# Altium PCB HEADSET-PCB.PcbDoc
Units mil, origin at the board's own origin, x right, y up, seen from the top; angles counter-clockwise.
Board outline 1235 x 1600 mil, 2 copper layers (Top Layer, Bottom Layer); 61 components, 57 nets, 232 pads, 104 vias.
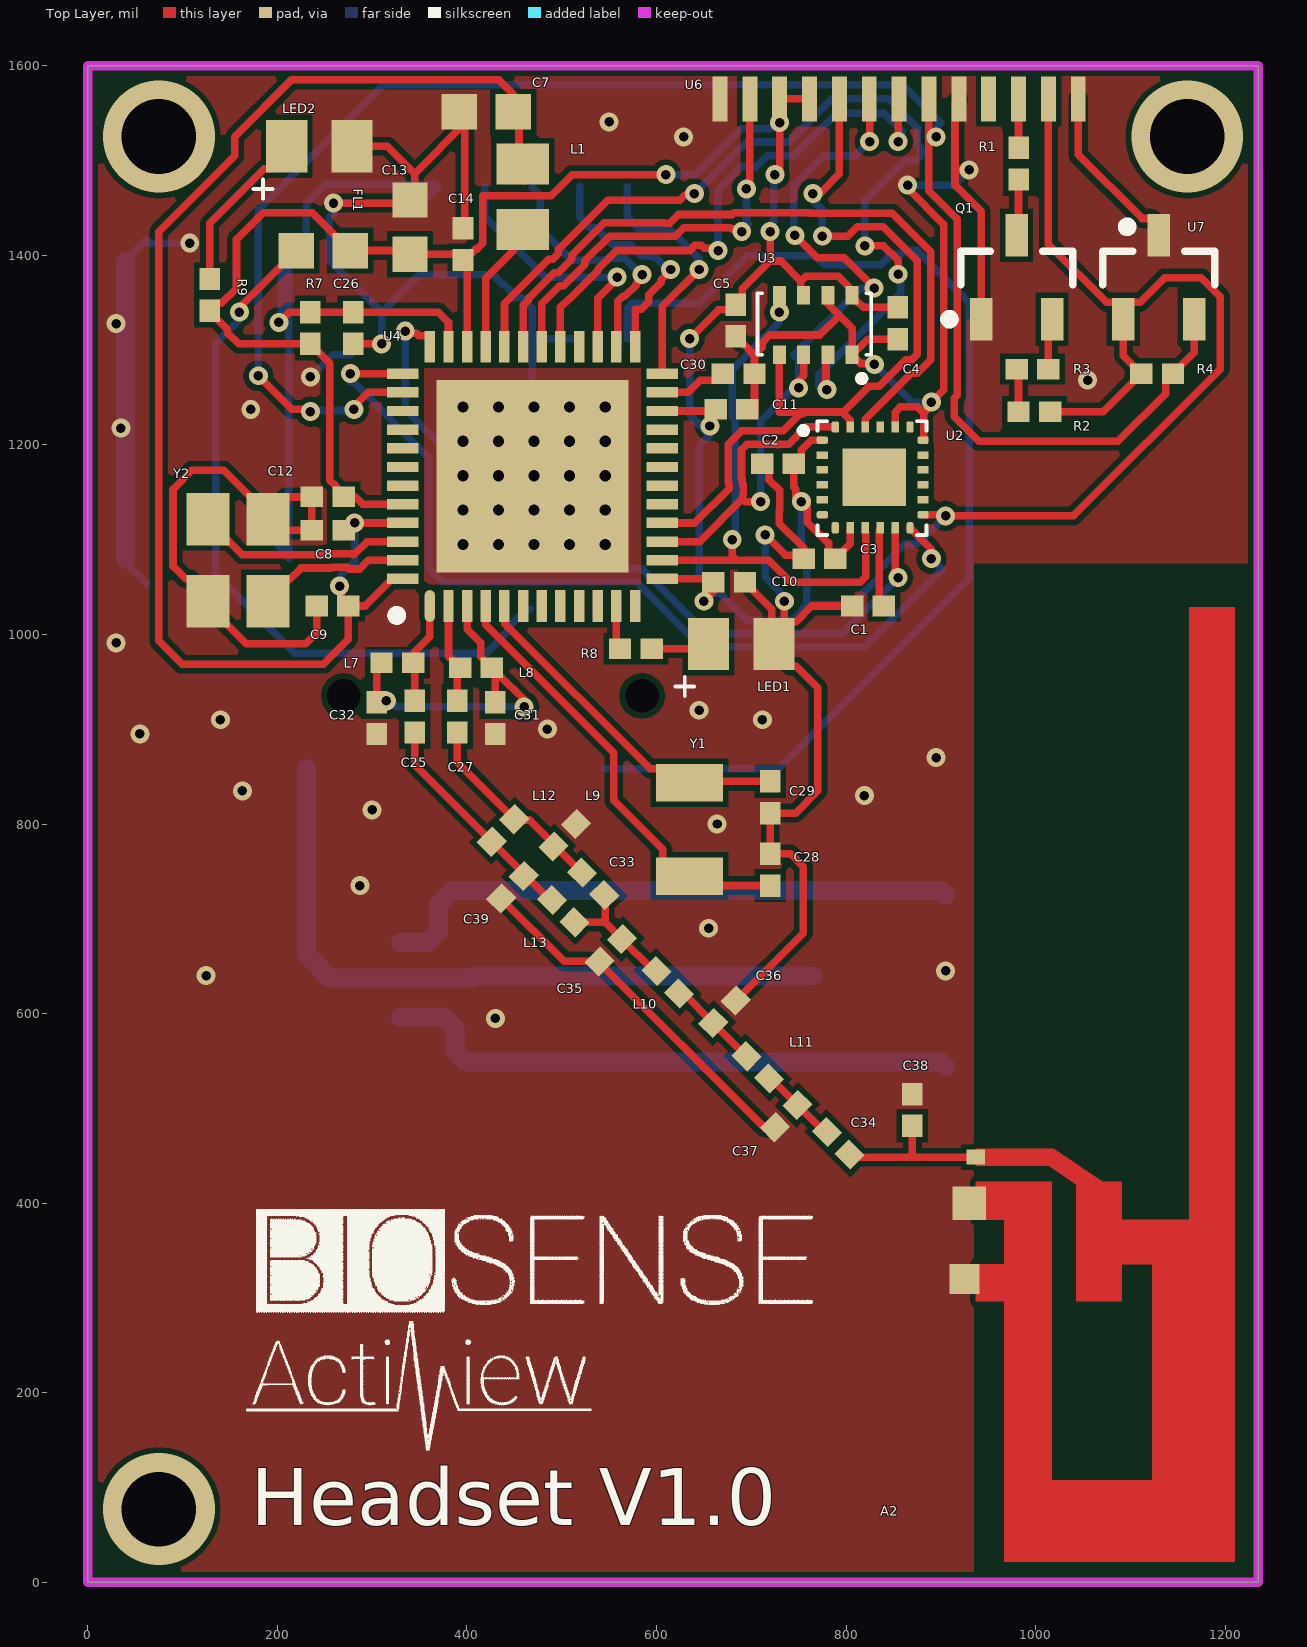
[diagram p0: Top Layer view]
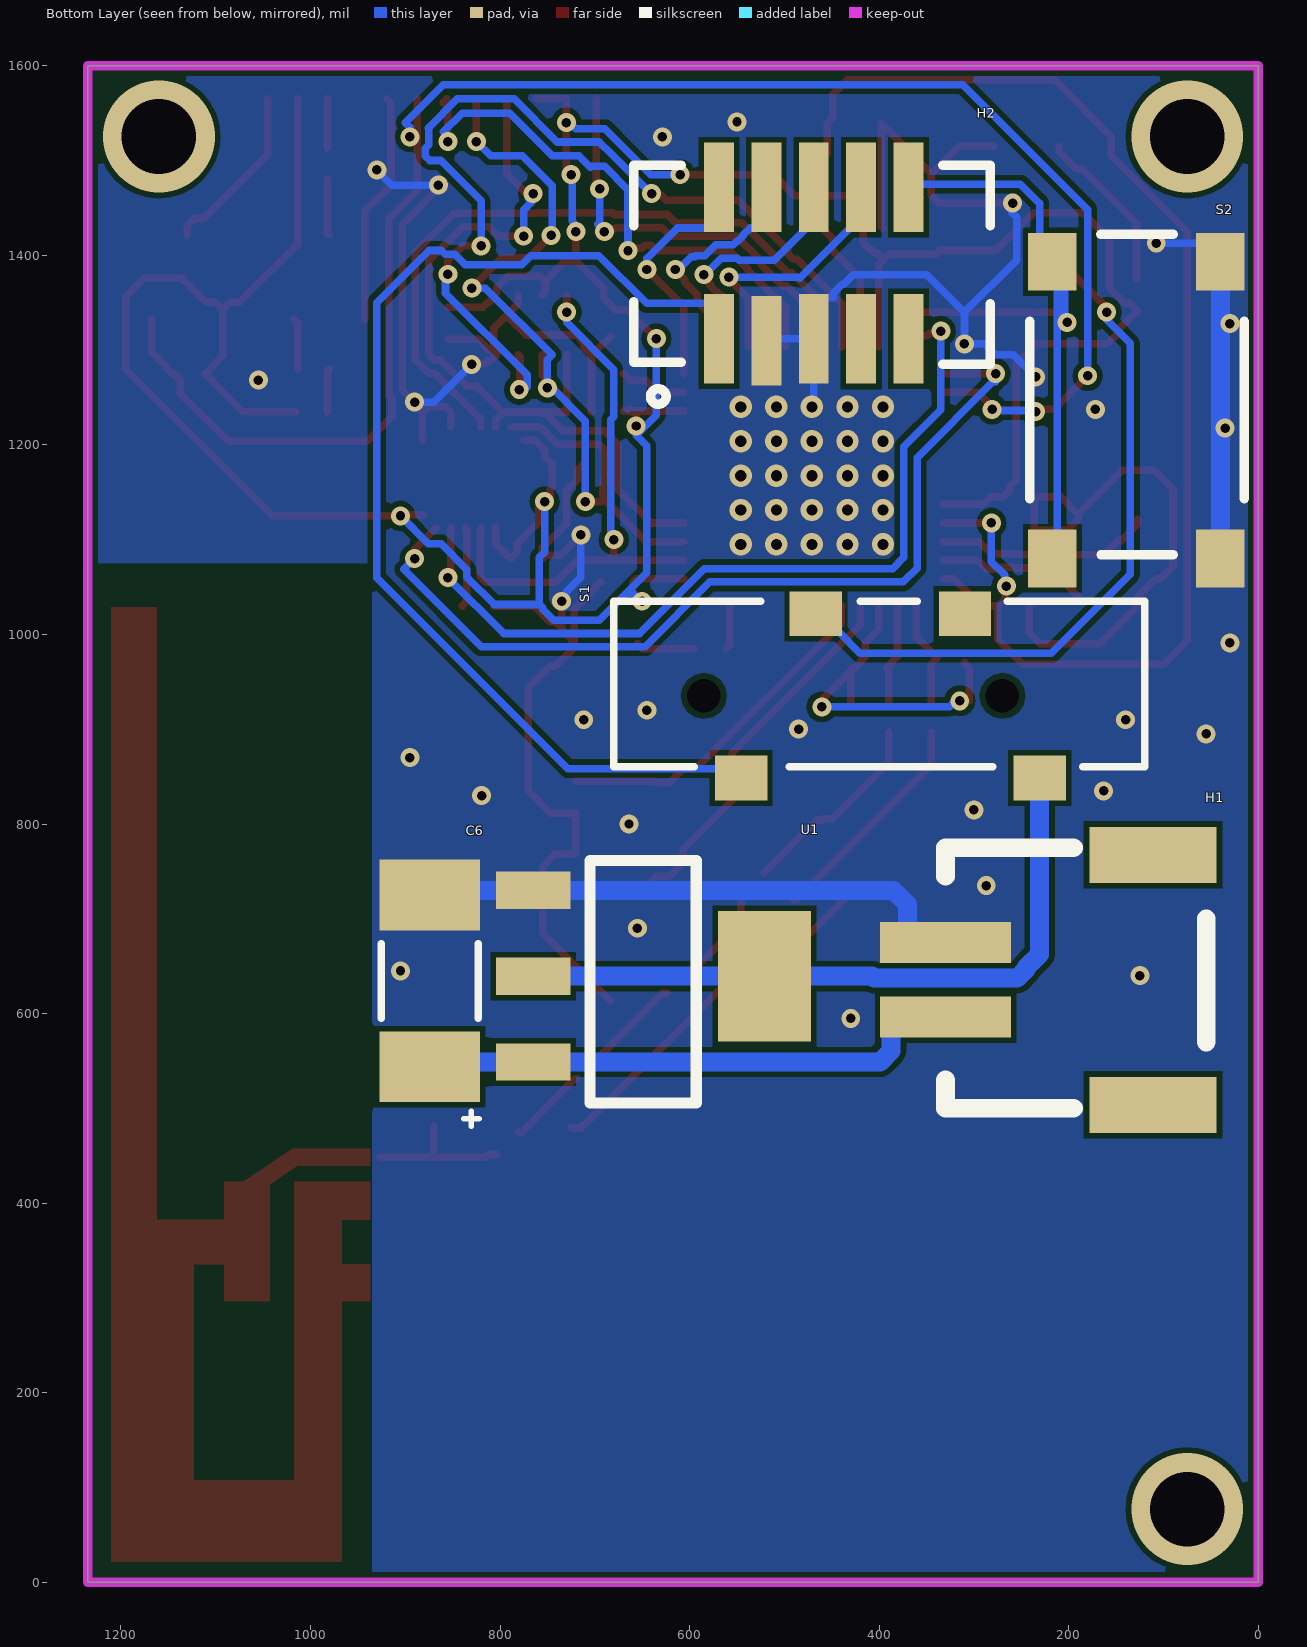
[diagram p1: Bottom Layer view, seen from below]

## Layer stack, top to bottom
Top Solder: solder mask 0.4, Solder Resist, Dk 3.5
Top Layer: signal copper 1.4
Dielectric 1: dielectric 12.6, FR-4, Dk 4.8
Bottom Layer: signal copper 1.4
Bottom Solder: solder mask 0.4, Solder Resist, Dk 3.5

## Board outline
0,0 1235,0 1235,1600 0,1600

## Design rules (kind name [scope] priority, off if disabled: settings)
Clearance [All] p1: gap=6 ignorepadtopadclearanceinfootprint=FALSE
ComponentClearance [All] p1: gap=0 collisioncheckmode=3 verticalgap=0 showdistances=FALSE
HoleSize [All] p1: absolutevalues=TRUE maxlimit=1000 minlimit=10 maxpercent=80.000 minpercent=20.000
MinimumSolderMaskSliver [All] p1: minsoldermaskwidth=0.05
PolygonConnect [All] p1: connectstyle=Direct reliefconductorwidth=10 reliefentries=4 polygonreliefangle="90 Angle" airgapwidth=10
RoutingVias [All] p1: holewidth=11.81 width=23.62 viastyle="Through Hole" minholewidth=10 minwidth=20 maxholewidth=196.85 maxwidth=196.85
SilkToSolderMaskClearance [IsPad] p1: minsilkscreentomaskgap=1 clearancetoexposedcopper=TRUE
SolderMaskExpansion [All] p1: expansion=4
Width [All] p1: maxlimit=20 minlimit=8 preferedwidth=8
26 further rules are at their usual default settings.

## Classes and differential pairs
component class IMU_MPU9250: C1 C2 C3 U2
component class LCD_Display: Q1 R1 R2 R3 R4 U6 U7
component class Microcontroller_CC1350: A2 C6 C7 C8 C9 C10 C11 C12 C13 C14 C25 C26 C27 C28 C29 C30 C31 C32 C33 C34 C35 C36 C37 C38 C39 FL1 H1 H2 L1 L7 L8 L9 L10 L11 L12 L13 LED1 LED2 R7 R8 R9 S1 S2 U1 U4 Y1 Y2
component class Pressure_BMP280: C4 C5 U3

## Components (designator, comment, footprint, x,y, rotation, side; value= is the part's Value field where it differs from the comment)
A2 "ANTENNA_DN007" Inverted_F_Antenna 1145,415 r90 top
C1 "0.1uF" 0402[IMP] 840,1030 r180 top
C2 "10nF" 0402[IMP] 745,1180 r180 top
C3 "0.1uF" 0402[IMP] 788.78,1080 r180 top
C4 "100nF" 0402[IMP] 854.47,1345 r270 top
C5 "100nF" 0402[IMP] 683.66,1347.99 r270 top
C6 "150uF" "2312 [IMP] Polar" 874.17,725 r270 bottom
C7 "22uF" 0603[IMP] 449.09,1551.2 r180 top
C8 "100nF" 0402[IMP] 270,1110 r180 top
C9 "100nF" 0402[IMP] 275,1030 r180 top
C10 "100nF" 0402[IMP] 660,1055 r0 top
C11 "100nF" 0402[IMP] 662.53,1237.43 r0 top
C12 "100nF" 0402[IMP] 270,1145 r180 top
C13 "22uF" 0603[IMP] 340,1401.22 r90 top
C14 "100nF" 0402[IMP] 395.95,1395 r90 top
C25 "12pF" 0402[IMP] 345,930 r270 top
C26 "100nF" 0402[IMP] 280,1340 r270 top
C27 "12pF" 0402[IMP] 390,930 r270 top
C28 "12pF" 0402[IMP] 720,735 r90 top
C29 "12pF" 0402[IMP] 720,845 r270 top
C30 "1uF" 0402[IMP] 670,1275 r0 top
C31 "12pF" 0402[IMP] 430,928.46 r270 top
C32 "12pF" 0402[IMP] 305,928.46 r270 top
C33 "1pF" 0402[IMP] 521.34,748.66 r315 top
C34 "12pF" 0402[IMP] 780,475 r315 top
C35 "DNI" 0402[IMP] 540,655 r45 top
C36 "3.6pF" 0402[IMP] 660,590 r45 top
C37 "1pF" 0402[IMP] 725,480 r45 top
C38 "1pF" 0402[IMP] 870,515 r270 top
C39 "1pF" 0402[IMP] 460,745 r225 top
FL1 "BLM18HE152SN1" 0603[IMP] 220,1405 r0 top
H1 "Battery Header" S2B-PH-SM4-TB 330,675 r270 bottom
H2 "JTAG" HDR-2*5-0.05_Without_Through_Hole 475,1385 r0 bottom
L1 "6.8uH" 0805[IMP] 458.94,1427.3 r90 top
L7 "10nH" 0402[IMP] 310,970 r0 top
L8 "10nH" 0402[IMP] 426.34,965 r180 top
L9 "2.2nH" 0402[IMP] 491.34,776.34 r45 top
L10 "1.5nH" 0402[IMP] 600,645 r315 top
L11 "2.2nH" 0402[IMP] 695,555 r315 top
L12 "DNI" 0402[IMP] 426.34,781.34 r45 top
L13 "2.2nH" 0402[IMP] 490,720 r315 top
LED1 "LEDG" "0805[IMP] - POLAR" 655,990 r0 top value=?
LED2 "LEDR" "0805[IMP] - POLAR" 210,1515 r0 top value=?
Q1 "MMBT2222" SOT-23_N 980,1376.83 r90 top
R1 "22" 0402[IMP] 982.01,1480 r90 top
R2 "10K" 0402[IMP] 982.01,1235 r0 top
R3 "1K" 0402[IMP] 980,1280 r0 top
R4 "10K" 0402[IMP] 1145,1275.08 r180 top
R7 "100k" 0402[IMP] 235,1340 r270 top
R8 "330" 0402[IMP] 595,985 r180 top
R9 "330" 0402[IMP] 128.54,1375 r270 top
S1 "SW-SP3T" CL-SB-13B 270,935.16 r0 bottom
S2 "SW_TACT" PTS645SH50SMTR92_LFS 40,1393.24 r270 bottom
U1 "1117-3.3" SOT-223 765,730 r270 bottom
U2 "MPU-9250" QFN-24-3mmx3mm 775,1205 r0 top
U3 "BMP280" LGA-8 806.54,1295 r270 top
U4 "IC_RF_CC13XX_7X7_QFN48_V2" "RGZ(S-PVQFN-N48) - duplicate" 360.95,1030 r90 top
U6 "LCD_TFT_Display" LCD_Ribbon 1045,1565 r90 top
U7 "APX803" SOT23_N 1130,1376.83 r90 top
Y1 "32.768kHz" FC-135 635,745 r90 top
Y2 "24MHz" TSX-3225 190,1035 r90 top

## Footprints (in the part's own frame and the unit in brackets; to place one, negate y for a bottom-side part, rotate by r counter-clockwise, add the part's x,y. Pads: shape width x height; smd on the part's side, far side on the other; paste and mask are expansions set on the pad)
0402[IMP] [mm]
  rect 0.6x0.55 smd: 1(0,0) 2(0.85,0)
0603[IMP] [mm]
  rect 0.95x0.95 smd: 1(0,0) 2(1.45,0)
0805[IMP] [mm]
  rect 1.1x1.4 smd: 1(0,0) 2(1.75,0)
"0805[IMP] - POLAR" [mm]
  rect 1.1x1.4 smd: 1(0,0) 2(1.75,0)
  silkscreen extent -0.89,-1.4 -0.38,-0.89
"2312 [IMP] Polar" [mm]
  rect 1.9x2.7 smd: 1(0,0) 2(4.6,0)
  silkscreen extent 1.3,-1.3 6.2,1.32
CL-SB-13B [mm] "Three pos switch"
  round 0.1 hole 0.9: 0(0,0) 0(8,0)
  rect 1.4x1.2 smd: 1(-1,2.2) 2(1,-2.2) 3(5,-2.2) 4(7,2.2)
  silkscreen extent -3.81,-2.54 10.41,1.91
FC-135 [mm]
  rect 1x1.8 smd: 1(0,0) 2(2.5,0)
HDR-2*5-0.05_Without_Through_Hole [mm]
  rect 0.8x2.4 smd: 1(2.388,1.854) 2(2.388,-2.21) 3(1.118,1.905) 4(1.118,-2.21) 5(-0.152,1.854) 6(-0.152,-2.21) 7(-1.422,1.854) 8(-1.422,-2.21) 9(-2.692,1.854) 10(-2.692,-2.21)
  silkscreen extent -4.88,-2.79 4.67,3.61
Inverted_F_Antenna [mil]
  rect 15.75x19.68 smd: 1(33.5,208)
  rect 35.43x35.43 smd: 2(-15,215)
  rect 31.5x31.5 smd: 3(-95,220)
  Top Layer region: -393.5,178 -393.5,-65 613.5,-65 613.5,-17 -32.5,-17 -32.5,54 7.5,54 7.5,74 42.5,126 42.5,208 24.5,208 24.5,131 4.5,102 -118.5,102 -118.5,54 -79.5,54 -79.5,22 -307.5,22 -307.5,128 7.5,128 7.5,208 -32.5,208 -32.5,178 -79.5,178 -79.5,208 -118.5,208 -118.5,178 -393.5,178
LCD_Ribbon [mm]
  rect 1.2x0.4 smd: 1(0,0) 2(0,0.8) 3(0,1.6) 4(0,2.4) 5(0,3.2) 6(0,4) 7(0,4.8) 8(0,5.6) 9(0,6.4) 10(0,7.2) 11(0,8) 12(0,8.8) 13(0,9.6)
LGA-8 [mm]
  rect 0.5x0.35 smd mask+0.05: 1(0,0) 2(0,-0.65) 3(0,-1.3) 4(0,-1.95) 5(-1.6,-1.95) 6(-1.6,-1.3) 7(-1.6,-0.65) 8(-1.6,0)
  silkscreen extent -1.65,-2.54 0.68,0.51
PTS645SH50SMTR92_LFS [mm] "Tactile switch"
  rect 1.55x1.3 smd: 1(0,0) 1(7.95,0) 2(0,-4.5) 2(7.95,-4.5)
  silkscreen extent -0.74,-5.11 7.85,0.63
QFN-24-3mmx3mm [mm]
  rrect50% 0.3x0.2 smd mask+0.05: 1(0,0) 6(0,-2) 13(2.7,-2) 18(2.7,0)
  rect 0.3x0.2 smd mask+0.05: 2(0,-0.4) 3(0,-0.8) 4(0,-1.2) 5(0,-1.6) 14(2.7,-1.6) 15(2.7,-1.2) 16(2.7,-0.8) 17(2.7,-0.4)
  rrect50% 0.2x0.3 smd mask+0.05: 7(0.35,-2.35) 12(2.35,-2.35) 19(2.35,0.35) 24(0.35,0.35)
  rect 0.2x0.3 smd mask+0.05: 8(0.75,-2.35) 9(1.15,-2.35) 10(1.55,-2.35) 11(1.95,-2.35) 20(1.95,0.35) 21(1.55,0.35) 22(1.15,0.35) 23(0.75,0.35)
  rect 1.7x1.54 smd mask+0.05: 25(1.397,-1)
  silkscreen extent -0.56,-2.54 2.79,0.51
"RGZ(S-PVQFN-N48) - duplicate" [mm]
  oval 0.85x0.28 smd mask+0.07: 1(0,0)
  rect 0.85x0.28 smd mask+0.07: 2(0,-0.5) 3(0,-1) 4(0,-1.5) 5(0,-2) 6(0,-2.5) 7(0,-3) 8(0,-3.5) 9(0,-4) 10(0,-4.5) 11(0,-5) 12(0,-5.5) 25(6.95,-5.5) 26(6.95,-5) 27(6.95,-4.5) 28(6.95,-4) 29(6.95,-3.5) 30(6.95,-3) 31(6.95,-2.5) 32(6.95,-2) 33(6.95,-1.5) 34(6.95,-1) 35(6.95,-0.5) 36(6.95,0)
  rect 0.28x0.85 smd mask+0.07: 13(0.725,-6.225) 14(1.225,-6.225) 15(1.725,-6.225) 16(2.225,-6.225) 17(2.725,-6.225) 18(3.225,-6.225) 19(3.725,-6.225) 20(4.225,-6.225) 21(4.725,-6.225) 22(5.225,-6.225) 23(5.725,-6.225) 24(6.225,-6.225) 37(6.225,0.725) 38(5.725,0.725) 39(5.225,0.725) 40(4.725,0.725) 41(4.225,0.725) 42(3.725,0.725) 43(3.225,0.725) 44(2.725,0.725) 45(2.225,0.725) 46(1.725,0.725) 47(1.225,0.725) 48(0.725,0.725)
  rect 5.15x5.15 smd mask+0.07: 49(3.475,-2.75)
  silkscreen extent -0.38,0.76 -0.13,1.02
S2B-PH-SM4-TB [mm] "S2B-PH-SM$-TB"
  rect 1.5x3.4 smd: 0(-2.35,5.56) 0(4.35,5.56)
  rect 1.1x3.5 smd: 1(2,0) 2(0,0)
  silkscreen extent -2.54,0 4.45,6.98
SOT23_N [mm] "SOT23, 3-Leads, Body 2.9x1.3mm, Pitch 0.95mm, Lead Span 2.3mm - Reverse Pinning, IPC Medium Density"
  rect 1.15x0.6 smd: 1(1.125,0) 2(-1.125,-0.95) 3(-1.125,0.95)
  silkscreen extent -0.2,-1.5 1.47,1.5, body extent -0.7,-1.5 0.7,1.5, height 1.1
SOT-23_N [mm] "SOT23, 3-Leads, Body 2.9x1.3mm, Pitch 0.95mm, Lead Span 2.5mm, IPC Medium Density"
  rect 1.15x0.6 smd: 1(-1.125,0.95) 2(-1.125,-0.95) 3(1.125,0)
  silkscreen extent -1.25,-1.5 0.7,1.92, body extent -0.7,-1.5 0.7,1.5, height 1.1
SOT-223 [mm]
  rect 1x2 smd: 1(0,0) 2(2.3,0) 3(4.6,0)
  rect 3.5x2.5 smd: 2(2.3,6.2)
  silkscreen extent -0.8,1.52 5.7,4.37
TSX-3225 [mm]
  rect 1.4x1.15 smd: 1(0,0) 2(2.2,0) 3(2.2,1.6) 4(0,1.6)

## Part data
C1 C2 C3 C4 C5 C35: library part CAPACITOR, Current=CIMAX, MAX_TEMP=CTMAX, PSpiceTemplate="C^@REFDES %1 %2 ?TOLERANCE|C^@REFDES| @VALUE ?IC/IC=@IC/ TC=@TC1,@TC2 ?TOLERANCE|\n.model C^@REFDES CAP C=1 DEV=@TOLERANCE%|", VOLTAGE=CMAX, CLASS=DISCRETE, DIST=FLAT, KNEE=CBMAX, SLOPE=CSMAX, TC1=0, TC2=0
C6: library part Cap_E, "Capacitor", Supplier Part Number 1=478-3481-1-ND, Supplier 1=Digi-Key
C7 C13: library part CAPACITOR, Current=CIMAX, MAX_TEMP=CTMAX, PSpiceTemplate="C^@REFDES %1 %2 ?TOLERANCE|C^@REFDES| @VALUE ?IC/IC=@IC/ TC=@TC1,@TC2 ?TOLERANCE|\n.model C^@REFDES CAP C=1 DEV=@TOLERANCE%|", Supplier Part Number 1=490-7611-1-ND, VOLTAGE=CMAX, CLASS=DISCRETE, DIST=FLAT, KNEE=CBMAX, SLOPE=CSMAX, Supplier 1=Digi-Key, TC1=0, TC2=0
C8 C9 C10 C11 C12 C14 C26: library part CAPACITOR, Current=CIMAX, MAX_TEMP=CTMAX, PSpiceTemplate="C^@REFDES %1 %2 ?TOLERANCE|C^@REFDES| @VALUE ?IC/IC=@IC/ TC=@TC1,@TC2 ?TOLERANCE|\n.model C^@REFDES CAP C=1 DEV=@TOLERANCE%|", Supplier Part Number 1=490-6327-1-ND, VOLTAGE=CMAX, CLASS=DISCRETE, DIST=FLAT, KNEE=CBMAX, SLOPE=CSMAX, Supplier 1=Digi-Key, TC1=0, TC2=0
C25 C27 C28 C29 C31 C32: library part CAPACITOR, Current=CIMAX, MAX_TEMP=CTMAX, PSpiceTemplate="C^@REFDES %1 %2 ?TOLERANCE|C^@REFDES| @VALUE ?IC/IC=@IC/ TC=@TC1,@TC2 ?TOLERANCE|\n.model C^@REFDES CAP C=1 DEV=@TOLERANCE%|", Supplier Part Number 1=399-1013-1-ND, VOLTAGE=CMAX, CLASS=DISCRETE, DIST=FLAT, KNEE=CBMAX, SLOPE=CSMAX, Supplier 1=Digi-Key, TC1=0, TC2=0
C30: library part CAPACITOR, Current=CIMAX, MAX_TEMP=CTMAX, PSpiceTemplate="C^@REFDES %1 %2 ?TOLERANCE|C^@REFDES| @VALUE ?IC/IC=@IC/ TC=@TC1,@TC2 ?TOLERANCE|\n.model C^@REFDES CAP C=1 DEV=@TOLERANCE%|", Supplier Part Number 1=1276-1448-1-ND, VOLTAGE=CMAX, CLASS=DISCRETE, DIST=FLAT, KNEE=CBMAX, SLOPE=CSMAX, Supplier 1=Digi-Key, TC1=0, TC2=0
C33 C37 C38 C39: library part CAPACITOR, Current=CIMAX, MAX_TEMP=CTMAX, PSpiceTemplate="C^@REFDES %1 %2 ?TOLERANCE|C^@REFDES| @VALUE ?IC/IC=@IC/ TC=@TC1,@TC2 ?TOLERANCE|\n.model C^@REFDES CAP C=1 DEV=@TOLERANCE%|", Supplier Part Number 1=490-3199-1-ND, VOLTAGE=CMAX, CLASS=DISCRETE, DIST=FLAT, KNEE=CBMAX, SLOPE=CSMAX, Supplier 1=Digi-Key, TC1=0, TC2=0
C34: library part CAPACITOR, Current=CIMAX, MAX_TEMP=CTMAX, PSpiceTemplate="C^@REFDES %1 %2 ?TOLERANCE|C^@REFDES| @VALUE ?IC/IC=@IC/ TC=@TC1,@TC2 ?TOLERANCE|\n.model C^@REFDES CAP C=1 DEV=@TOLERANCE%|", Supplier Part Number 1=490-5924-1-ND, VOLTAGE=CMAX, CLASS=DISCRETE, DIST=FLAT, KNEE=CBMAX, SLOPE=CSMAX, Supplier 1=Digi-Key, TC1=0, TC2=0
C36: library part CAPACITOR, Current=CIMAX, MAX_TEMP=CTMAX, PSpiceTemplate="C^@REFDES %1 %2 ?TOLERANCE|C^@REFDES| @VALUE ?IC/IC=@IC/ TC=@TC1,@TC2 ?TOLERANCE|\n.model C^@REFDES CAP C=1 DEV=@TOLERANCE%|", Supplier Part Number 1=490-5939-1-ND, VOLTAGE=CMAX, CLASS=DISCRETE, DIST=FLAT, KNEE=CBMAX, SLOPE=CSMAX, Supplier 1=Digi-Key, TC1=0, TC2=0
FL1: library part INDUCTOR, Current=LMAX, DIELECTRIC=DSMAX, PSpiceTemplate="L^@REFDES %1 %2 ?TOLERANCE|L^@REFDES| @VALUE ?IC/IC=@IC/ ?TOLERANCE|\n.model l^@REFDES IND L=1 DEV=@TOLERANCE%|", Supplier Part Number 1=490-5216-1-ND, DIST=FLAT, Supplier 1=Digi-Key
H1: library part "Header 2", Supplier Part Number 1=455-1749-1-ND, Supplier 1=Digi-Key
H2: library part JTAG-ARM, "USB JTAG Programmer", Supplier Part Number 1=SAM13160CT-ND, Supplier 1=Digi-Key
L1: library part INDUCTOR, Current=LMAX, DIELECTRIC=DSMAX, PSpiceTemplate="L^@REFDES %1 %2 ?TOLERANCE|L^@REFDES| @VALUE ?IC/IC=@IC/ ?TOLERANCE|\n.model l^@REFDES IND L=1 DEV=@TOLERANCE%|", Supplier Part Number 1=445-6761-1-ND, DIST=FLAT, Supplier 1=Digi-Key
L7 L8: library part INDUCTOR, Current=LMAX, DIELECTRIC=DSMAX, PSpiceTemplate="L^@REFDES %1 %2 ?TOLERANCE|L^@REFDES| @VALUE ?IC/IC=@IC/ ?TOLERANCE|\n.model l^@REFDES IND L=1 DEV=@TOLERANCE%|", Supplier Part Number 1=712-1407-1-ND, DIST=FLAT, Supplier 1=Digi-Key
L9 L11 L13: library part INDUCTOR, Current=LMAX, DIELECTRIC=DSMAX, PSpiceTemplate="L^@REFDES %1 %2 ?TOLERANCE|L^@REFDES| @VALUE ?IC/IC=@IC/ ?TOLERANCE|\n.model l^@REFDES IND L=1 DEV=@TOLERANCE%|", Supplier Part Number 1=490-6794-1-ND, DIST=FLAT, Supplier 1=Digi-Key
L10: library part INDUCTOR, Current=LMAX, DIELECTRIC=DSMAX, PSpiceTemplate="L^@REFDES %1 %2 ?TOLERANCE|L^@REFDES| @VALUE ?IC/IC=@IC/ ?TOLERANCE|\n.model l^@REFDES IND L=1 DEV=@TOLERANCE%|", Supplier Part Number 1=490-6783-1-ND, DIST=FLAT, Supplier 1=Digi-Key
L12: library part INDUCTOR, Current=LMAX, DIELECTRIC=DSMAX, PSpiceTemplate="L^@REFDES %1 %2 ?TOLERANCE|L^@REFDES| @VALUE ?IC/IC=@IC/ ?TOLERANCE|\n.model l^@REFDES IND L=1 DEV=@TOLERANCE%|", DIST=FLAT
LED1: library part LED_G, "LED", Supplier 1=Digi-Key, Supplier 2=Digi-Key, Supplier Part Number 2=475-1410-1-ND
LED2: library part LED_R, "LED", Supplier Part Number 1=475-1278-1-ND, Supplier 1=Digi-Key
Q1: library part 2N3904, "NPN General Purpose Amplifier", ComponentLink1Description="Manufacturer Link", ComponentLink1URL=http://www.fairchildsemi.com/, ComponentLink2Description=Datasheet, ComponentLink2URL=http://www.fairchildsemi.com/ds/2N%2F2N3904.pdf, DatasheetVersion=1997, LatestRevisionDate=15-Jan-2003, LatestRevisionNote="PCB Footprint 'BCY-W3/D4.7' replaced", PackageDescription="TO, Flat Index; 3 In-Line, Axial Leads; Body Dia. 4.5mm; Leads 0.51 x 0.48 mm (max)", PackageReference=TO-92A, PackageVersion=Sep-1998, Published=8-Jun-2000, Publisher="Altium Limited"
R1 R2 R3 R4: library part RESISTOR
R7: library part RESISTOR, Supplier Part Number 1=541-100KYACT-ND, Supplier 1=Digi-Key
R8 R9: library part RESISTOR, Supplier Part Number 1=P330LCT-ND, Supplier 1=Digi-Key
S2: "Tactile switch", Supplier Part Number 1=CKN9085CT-ND, Supplier 1=Digi-Key
U1: library part 1117-3.3V, "3.3V Voltage Regulator", Supplier Part Number 1=LM1117IMPX-3.3/NOPBCT-ND, Supplier 1=Digi-Key
U4: Supplier Part Number 1=296-44716-1-ND, Design_Date=2014-09-04, Designed_By="Artur Bielinski", SPLIT_INST=TRUE, Supplier 1=Digi-Key, SWAP_INFO=(S1+S2)
Y1: library part CRYSTAL, Supplier Part Number 1=SER4089CT-ND, Supplier 1=Digi-Key
Y2: library part XTAL_4PIN_S, Supplier Part Number 1=SER3635CT-ND, Supplier 1=Digi-Key
A2: Design date=2011-09-19, Designed by="Artur Bielinski"

## Via types
v1: diameter 20, hole 10, Top Layer to Bottom Layer, 76 vias
v2: diameter 23.62, hole 11.81, Top Layer to Bottom Layer, 25 vias
v3: diameter 118.11, hole 78.74, Top Layer to Bottom Layer, 3 vias

## Nets (pads, with @x,y where several pads share a name; then routed paths per layer and width w, separated by ;. In a path a pad name is that pad's centre, name@x,y a point inside that pad or via, vN(x,y) a via of type N, cw(c..) or ccw(c..) an arc to the next point about the centre after c; other vN are vias at no path point)
BACKLIGHT: R2.1 R3.1 | length 45.8
  Top Layer w8: R3.1 982.01,1277.99 R2.1
BMP_CS: U3.2 U4.32 | length 993.3
  Top Layer w8: U4.32 439.68,1348.96 486.37,1395.64 490.64,1395.64 496.5,1401.5 496.5,1405.77 548.73,1458 624.72,1458 630,1463.28 ; v1(779.72,1258.25) 778.92,1257.46 778.92,1292.98 U3.2 ; v1(820,1410) 839.55,1410 855,1394.55 v1(855,1380)
  Bottom Layer w8: v1(640,1465) 640.85,1465 646.85,1471 646.9,1471 681.75,1505.84 681.75,1505.9 695.33,1519.48 739.68,1519.48 785.2,1565 845,1565 875.86,1534.14 875,1533.28 875,1516.72 878.85,1512.86 878.85,1504.69 874.17,1500 862.72,1500 820,1457.28 v1(820,1410) ; v1(779.72,1258.25) 774.49,1258.25 771.37,1261.37 771.37,1273.74 857.56,1359.93 857.56,1374.69 855,1377.25 v1(855,1380)
CC1350_SW_PWR: U4.43
CC1350_VDD: FL1.1 S1.3 | length 764.1
  Top Layer w8: v1@163.22,1340 162.3,1340.92 162.3,1347.3 FL1.1
  Bottom Layer w8: v1(160,1340) 160,1331.94 135,1306.94 135,1063.46 218.3,980.16 420.24,980.16 443.29,1003.21 443.29,1007.15 462.91,1026.77 S1.3@466.85,1026.77
DC: U4.29 U6.7 | length 600.5
  Top Layer w8: U4.29 498.74,1345.08 507.31,1353.64 508.03,1353.64 538.5,1384.1 538.5,1385.69 557.81,1405 635,1405 640.56,1410.56 647.19,1410.56 650.45,1407.3 662.7,1407.3 v1(665,1405) ; v1(855,1520) 855,1556.31 859.85,1561.17 U6.7
  Bottom Layer w8: v1(665,1405) 665,1469.3 689.6,1493.9 703.28,1493.9 704.28,1492.9 704.61,1492.9 716.72,1505 745,1505 790,1550 840,1550 859.85,1530.15 855,1525.29 v1(855,1520)
DCDC_SW: L1.1 U4.33 | length 139.8
  Top Layer w8: U4.33 420,1375.91 449.09,1405 449.09,1417.45 L1.1
GND: A2.2 A2.3 C1.2 C2.2 C3.2 C4.2 C5.2 C6.1 C7.2 C8.2 C9.2 C10.2 C11.2 C12.2 C13.2 C14.2 C26.2 C28.2 C29.2 C30.2 C31.2 C32.2 C35.1 C36.2 C37.1 C38.1 C39.2 H1.2 H2.3 H2.5 L9.2 LED1.2 LED2.2 Q1.1 S2.1 U1.1 U2.18 U2.20 U3.1 U3.7 U4.49 U6.1 U6.5 U6.13 U7.1 Y2.2 Y2.4 | length 5270.6
  Top Layer w8: C9.2 241.54,1001.54 230,990 167.09,990 127.01,1030.08 Y2.4 127.01,1039.92 108.37,1058.56 103.45,1058.56 90,1072.01 90,1153.17 110,1173.17 143.36,1173.17 190,1126.54 Y2.2@190,1126.36 ; v1(259.31,1455) 336.69,1455 C13.2 344.97,1463.28 344.97,1486.15 ; LED2.2 316.12,1515 344.97,1486.15 ; C26.2 v1(310,1306.54) ; C14.2 397.91,1430.43 397.91,1539.09 344.97,1486.15 ; C39.2 502.67,655 528.95,655 529.65,654.3 539.3,654.3 711.16,482.45 711.51,482.45 714.65,479.3 724.3,479.3 C37.1 ; C36.2 755,685 755,755 741.54,768.46 C28.2 C29.2 746.86,811.54 770.33,835 770.33,943.57 747.46,966.44 741.55,966.44 723.9,984.09 LED1.2 LED1.2@723.9,994.27 ; C5.2 683.66,1313.54 690.49,1306.72 691.47,1306.72 703.46,1294.73 ; C10.2 694.45,1055 700.28,1049.17 700.28,1048.19 721.76,1026.7 721.76,992.13 LED1.2@723.9,994.27 ; C11.2@703.46,1235 C30.2 703.46,1294.73 ; C2.2 711.68,1180 718.51,1173.17 718.51,1163.36 730,1151.87 730,1131.72 729.56,1131.27 729.56,1116.98 755.31,1091.22 755.31,1083.46 C3.2 751.86,1083.46 736.19,1083.46 v1(714.65,1105) ; v1(735,1035) LED1.2@735,1007.01 ; U3.7 780.94,1348.78 806.54,1323.19 U3.1@806.54,1297.95 ; 789.51,1333.03 772.39,1315.91 719.8,1315.91 711.63,1307.74 711.63,1302.89 703.46,1294.73 ; U3.1@803.65,1297.89 803.65,1294.94 809.43,1289.16 812.38,1289.16 815.71,1285.82 829.18,1285.82 v1(830,1285) ; C1.2 763.9,1030 747.46,1013.56 741.55,1013.56 LED1.2@735,1007.01 ; U3.1 U3.1@806.54,1297.95 ; U2.20 851.77,1234.28 857.49,1240 875,1240 881.3,1233.7 ; C4.2 823.07,1311.54 812.38,1300.84 809.43,1300.84 U3.1@806.54,1297.95 ; v1(865,1474) 865,1470.75 903.3,1432.46 903.3,1258.3 v1(890,1245) 890,1241.69 882.02,1233.7 882.02,1205.72 U2.18 ; U6.5 915.14,1561.13 915.14,1540.83 915,1540.69 915,1490 ; v1(930,1490) 915,1490 ; Q1.1 942.6,1446.3 915,1473.9 915,1490 ; U6.1 1045,1506.13 1112.29,1438.84 1122.19,1438.84 1130,1431.02 U7.1 ; Y2.2@190,1126.36 208.64,1145 C12.2 C8.2 201.61,1110 Y2.2 Y2.2@190,1126.36 ; LED1.2@723.9,994.27 735,1005.37 LED1.2@735,1007.01
  Bottom Layer w8: S2.1@40,1080.25 40,1075.33 S2.1@61.59,1053.74 ; S2.1@40,1393.24 40,1394.93 61.59,1416.52 65.3,1412.81 v1(107.67,1412.81) ; v1(235,1271.69) 258.39,1295.08 277.19,1295.08 288.64,1306.54 v1(310,1306.54) 310,1340 ; v1(259.31,1455) 259.31,1445.69 260,1445 255,1440 255,1395 310,1340 ; v2(470.95,1240) 469,1241.94 H2.5 ; H2.3 517,1312 H2.5 ; v1(714.65,1105) 714.65,1060.35 729.94,1045.06 729.94,1043.3 735,1038.25 v1(735,1035) ; v1(830,1285) 870,1245 v1(890,1245) ; v1(865,1474) 914,1474 v1(930,1490) ; 310,1340 349.62,1379.62 427.1,1379.62 437.48,1369.24 438.89,1369.24 448.43,1359.7 448.43,1355.24 457.25,1355.24 469,1343.5 H2.5
  Bottom Layer w20: S2.1@40,1080.25 S2.1@40,1393.24 ; H1.2 358.28,675 369.94,686.65 369.94,714.94 385,730 U1.1 900,730 C6.1@905,725
  other v1: 430,595 125,640 905,645 655,690 287.05,735 663.92,800 300,815 819.4,830 163.22,835 895,870 55,895 485,900 140,910 711.68,910 645,920 30,991.02 35,1217.71 172.01,1237.43 1055,1268.25 30,1327.97 628.66,1525 550,1540.69
  other v2: 395.95,1095 433.45,1095 470.95,1095 508.45,1095 545.95,1095 395.95,1131.25 433.45,1131.25 470.95,1131.25 508.45,1131.25 545.95,1131.25 395.95,1167.5 433.45,1167.5 470.95,1167.5 508.45,1167.5 545.95,1167.5 395.95,1203.75 433.45,1203.75 470.95,1203.75 508.45,1203.75 545.95,1203.75 395.95,1240 433.45,1240 508.45,1240 545.95,1240
INT: U2.12 U4.37 | length 963.7
  Top Layer w8: v1(277.19,1275.08) U4.37 ; U2.12 890,1090 v1(890,1080)
  Bottom Layer w8: v1(277.19,1275.08) 277.19,1266.61 279.95,1266.61 360,1186.55 360,1070 374.61,1055.39 578.61,1055.39 647,987 819.83,987 901.42,1068.58 v1(890,1080)
JTAG_TCK: H2.4 U4.25 | length 254.4
  Top Layer w8: U4.25 577.48,1342.91 583.8,1342.91 592,1351.11 592,1358.37 604.96,1371.33 604.96,1374.31 611.4,1380.76 611.4,1384.63 611.04,1385 v1(615,1385)
  Bottom Layer w8: H2.4 519,1440.5 530.75,1428.76 536.24,1428.76 543.25,1421.75 543.25,1420.61 549.11,1414.76 550.24,1414.76 554.09,1410.91 572.58,1410.91 583.87,1399.62 593.24,1399.62 594.24,1398.62 598.13,1398.62 611.75,1385 v1(615,1385)
JTAG_TDI: H2.8 U4.27 | length 280.2
  Top Layer w8: U4.27 538.11,1354.82 537.91,1354.82 558.5,1375.4 v1(558.5,1376.91)
  Bottom Layer w8: H2.8 419,1440.5 483.6,1375.91 484.6,1376.91 v1(558.5,1376.91)
JTAG_TDO: H2.6 U4.26 | length 265.1
  Top Layer w8: U4.26 559,1304.83 559,1351.4 564.5,1356.91 566.78,1356.91 578.5,1368.62 578.5,1369.91 584.96,1376.37 v1(584.96,1379.62)
  Bottom Layer w8: H2.6 477.56,1463.44 477.56,1428.21 510.87,1394.91 547.72,1394.91 549.72,1396.91 566.78,1396.91 584.07,1379.62 v1(584.96,1379.62)
JTAG_TMS: H2.2 U4.24 | length 263.3
  Top Layer w8: U4.24 606.02,1346.02 v1(645,1385)
  Bottom Layer w8: H2.2 569,1440.5 580.75,1428.76 612.8,1428.76 645,1396.56 v1(645,1385)
MISO_BUS: U2.9 U3.5 U4.14 | length 583.8
  Top Layer w8: U4.14 685,1078.23 ; v1(680,1100) 680,1083.23 685,1078.23 ; v1(729.76,1340) U3.5 ; U2.9 820.34,1112.42 820.34,1108.23 820.81,1107.76 820.81,1060.81 815,1055 741.89,1055 718.66,1078.23 685,1078.23
  Bottom Layer w8: v1(680,1100) 683.22,1103.22 683.22,1226.46 680,1229.68 680,1279.37 729.76,1329.13 v1(729.76,1340)
MOSI_BUS: U2.24 U3.3 U4.15 U6.8 | length 919.9
  Top Layer w8: U4.15 645.63,1097.91 690.72,1143.01 ; v1(710,1140) 693.73,1140 690.72,1143.01 ; v1@743.73,1261.27 755.35,1272.89 U3.3 ; v1(746,1420.99) 746,1420.94 769.72,1397.22 798.18,1397.22 829.6,1365.8 v1(829.6,1365.4) ; U2.24 784.05,1218.78 783.89,1218.94 780.86,1218.94 780.8,1219 757.59,1219 739.41,1200.83 729.05,1200.83 728.27,1200.05 727.49,1200.83 695.58,1200.83 689.72,1194.97 689.72,1165.03 690.72,1164.03 690.72,1159.52 691.72,1158.52 691.72,1146.93 690.72,1145.93 690.72,1143.01 ; U6.8 825,1564.53 v1(825,1520)
  Bottom Layer w8: v1(710,1140) 710,1225 745,1260 v1(750,1260) 750,1290 745,1295 815.4,1365.4 v1(829.6,1365.4) ; v1(746,1420.99) 745,1421.99 745,1473.28 776.72,1505 810,1505 v1(825,1520)
MPU_CS: U2.22 U4.31 | length 751.8
  Top Layer w8: U4.31 459.37,1347.43 465.05,1353.11 465.05,1354.53 492.17,1381.64 496.44,1381.64 510.5,1395.7 510.5,1399.97 544.75,1434.22 608.67,1434.22 608.89,1434 614.2,1434 623.2,1443 679.72,1443 681.72,1445 761.73,1445 762.46,1444.28 848.53,1444.28 889.3,1403.51 889.3,1289.78 875.24,1275.72 868.98,1275.72 820.34,1227.08 U2.22 U2.22
MPU_SYNC: U2.11 U4.36 | length 893.1
  Top Layer w8: v1(335,1320) 337.3,1317.7 346.86,1317.7 349.34,1315.23 359.43,1315.23 360.95,1313.72 U4.36 ; U2.11 851.77,1066.48 855,1063.25 v1(855,1060)
  Bottom Layer w8: v1(335,1320) 330,1320 332.5,1317.5 335,1315 335,1237.06 374,1198.06 374,1081.33 385.94,1069.39 584.4,1069.39 652.8,1001 796,1001 v1(855,1060)
NetA1_1: 
NetA2_1: A2.1 C34.2 C38.2 | length 157.5
  Top Layer w8: C34.2 811.9,451.34 814.74,448.5 870,448.5 ; C38.2 870,448.5 ; 927,448.5 870,448.5
NetC1_1: C1.1 U2.10 | length 85
  Top Layer w8: U2.10 836.02,1110.64 835,1109.61 835,1035 C1.1
NetC6_2: C6.2 H1.1 U1.3 | length 610.7
  Bottom Layer w20: H1.1 375.68,596.26 387.33,584.61 387.33,560.61 399.05,548.9 U1.3 900,548.9 C6.2@905,543.9
NetC15_2: 
NetC17_1: 
NetC17_2: 
NetC19_1: 
NetC20_1: 
NetC23_1: 
NetC25_1: C25.1 L7.2 U4.1 | length 104.5
  Top Layer w8: L7.2@339.45,975 345.28,980.83 345.28,981.81 360.95,997.48 U4.1 ; L7.2 345,968.46 C25.1
NetC25_2: 
NetC26_1: C26.1 H2.10 R7.1 S2.2 U4.35 | length 849.9
  Top Layer w8: v1(201.65,1329.2) 212.46,1340 R7.1 ; R7.1@240,1340 C26.1 370,1340 380.63,1329.37 U4.35
  Bottom Layer w8: S2.2@195.57,1101.84 212.17,1080.25 S2.2@212.17,1393.24 ; v1(201.65,1329.2) 201.65,1332.44 204.37,1335.16 204.37,1380.45 S2.2@212.17,1393.24 ; H2.10@357.25,1460.25 H2.10 366,1475 251.03,1475 230.63,1454.6 230.63,1411.71 S2.2@212.17,1393.24
NetC27_1: C27.1 L8.2 U4.2 | length 105.4
  Top Layer w8: U4.2 380.63,977.24 386.06,971.81 386.06,970.83 391.89,965 390,963.11 C27.1
NetC27_2: 
NetC28_1: C28.1 U4.4 Y1.1 | length 471.1
  Top Layer w8: U4.4 420,1010.24 555,875.24 555,825 606.83,773.17 606.83,759.69 621.52,745 Y1.1 645,735 C28.1
NetC29_1: C29.1 U4.5 Y1.2 | length 368.9
  Top Layer w8: U4.5 440,1029.68 440,1011.46 593.35,858.11 606.83,858.11 621.52,843.43 Y1.2 636.57,845 C29.1
NetC30_1: C30.1 U4.23 | length 72.7
  Top Layer w8: U4.23 633.37,1255.39 646.17,1268.19 663.19,1268.19 663.19,1269.17 669.02,1275 C30.1
NetC31_1: C31.1 C32.1 L7.1 L8.1 U4.3 | length 360
  Top Layer w8: C32.1@305,930 305,965 L7.1 ; U4.3 400.32,1005.39 414.68,991.02 414.68,976.65 419.53,971.81 419.53,970.83 430,960.35 C31.1 ; L8.1 427.32,965 434.15,958.17 434.15,957.19 460.39,930.94 v1(460.39,923.62)
  Bottom Layer w8: v1(315,930) 317.3,927.7 321.6,927.7 325.69,923.62 v1(460.39,923.62)
NetC33_1: C27.2 C33.1 L9.1 L12.2 | length 211.6
  Top Layer w8: C27.2 390,865 L12.2 450.7,805.7 458.94,805.7 460.39,804.24 465.76,804.24 C33.1
NetC33_2: C33.2 C35.2 L10.1 L13.2 | length 137.3
  Top Layer w8: L13.2 514.36,695.64 522.6,695.64 523.3,696.34 545.99,696.34 ; C33.2 545,716.76 545.99,715.77 545.99,696.34 ; L10.1 597.33,645 C35.2 545.99,696.34
NetC34_1: C34.1 C37.2 L11.2 | length 84.7
  Top Layer w8: L11.2 720.99,531.34 C37.2 777.33,475 C34.1
NetC36_1: C36.1 L10.2 L11.1 | length 98.8
  Top Layer w8: L10.2 628.66,621.34 C36.1 L11.1
NetC39_1: C25.2 C39.1 L12.1 L13.1 | length 238
  Top Layer w8: C25.2 345,862.67 L12.1 487.67,720 L13.1
NetLED1_1: LED1.1 R8.1 | length 62.1
  Top Layer w8: R8.1 650,985 LED1.1
NetLED2_1: LED2.1 R9.1 | length 177.2
  Top Layer w8: R9.1 128.54,1433.54 186.44,1491.44 192.35,1491.44 210,1509.09 LED2.1
NetQ1_2: Q1.2 R3.2 | length 54.2
  Top Layer w8: R3.2 1013.46,1328.61 Q1.2
NetQ1_3: Q1.3 R1.1 | length 59.7
  Top Layer w8: Q1.3 982.01,1423.13 R1.1
NetR1_2: R1.2 U6.3 | length 51.5
  Top Layer w8: R1.2 U6.3
NetR5_1: 
NetR8_2: R8.2 U4.11 | length 46.5
  Top Layer w8: U4.11 557.8,988.74 R8.2
NetS1_1: S1.1 U1.2 | length 742.3
  Bottom Layer w20: S1.1@230.63,858.39 S1.1 230.63,662.61 245.1,648.13 245.1,646.72 254.47,637.35 405.53,637.35 407.63,639.45 520.91,639.45 U1.2@765,639.45
NetU4_46: U4.46 Y2.3 | length 230.3
  Top Layer w8: Y2.3 127.01,1116.69 144.65,1099.06 148.22,1099.06 163.22,1084.06 250.79,1084.06 251.73,1084.99 279.89,1084.99 280.83,1084.06 294.69,1097.91 U4.46
NetU4_47: U4.47 Y2.1 | length 164.8
  Top Layer w8: Y2.1 190,1039.92 207.64,1057.56 212.56,1057.56 225.06,1070.06 256.59,1070.06 257.53,1070.99 274.1,1070.99 276.03,1069.06 287.05,1069.06 296.22,1078.23 U4.47
RF_SW: U4.6
SCK_BUS: U2.23 U3.4 U4.16 U6.9 | length 863.7
  Top Layer w8: U4.16 640.6,1117.6 676.72,1153.72 676.72,1158.23 675.72,1159.23 675.72,1200.77 689.78,1214.83 733.61,1214.83 751.79,1233 754.62,1233 755.3,1233.69 754.3,1234.69 ; 729.73,1267.07 729.73,1236 729.66,1236 729.73,1235.93 729.73,1234.69 754.3,1234.69 ; 729.76,1267.1 U3.4 ; v1(765,1465) 772.05,1465 793.03,1485.98 U6.9 ; v1(775,1420.22) 801.94,1420.22 811.72,1430 839.35,1430 875.3,1394.05 875.3,1295.58 869.44,1289.72 863.01,1289.72 834.99,1261.7 824.73,1261.7 796.71,1233.69 ; U2.23 804.53,1225.86 796.71,1233.69 ; 754.3,1234.69 795.71,1234.69 796.71,1233.69
  Bottom Layer w8: v1(765,1465) 765.36,1465 770.33,1460.03 766.54,1456.24 775,1447.77 v1(775,1420.22)
T\F\T\R\S\T\: R4.1 U4.38 U6.6 U7.2 | length 1857.5
  Top Layer w8: v1(180,1272.89) 215.46,1237.43 229.32,1237.43 231.75,1235 v1(235,1235) ; v1(280.84,1237.43) 280.84,1240 296.23,1255.39 U4.38 ; U6.6 887.52,1468.03 917.3,1438.25 917.3,1252.43 914,1249.13 914,1229.75 940,1203.75 1086.9,1203.75 1137.19,1254.04 1137.19,1268.25 1144.02,1275.08 R4.1 1145.98,1275.08 1152.81,1281.91 1152.81,1282.89 1167.4,1297.48 U7.2
  Bottom Layer w8: v1(180,1272.89) 180,1448.15 311.85,1580 860,1580 900,1540 895,1535 v1(895,1525) ; v1(235,1235) 236.22,1236.22 279.62,1236.22 v1(280.84,1237.43)
TFTCS: U4.30 U6.12 | length 445.8
  Top Layer w8: U4.30 479.05,1348.73 497.97,1367.64 502.24,1367.64 524.5,1389.9 524.5,1394.17 550.55,1420.22 602.87,1420.22 603.09,1420 620,1420 629,1429 677.16,1429 677.7,1428.46 679.31,1428.46 680.48,1427.3 687.7,1427.3 v1(690,1425) ; v1(695,1470) 695,1471.51 698.54,1467.97 U6.12
  Bottom Layer w8: v1(690,1425) 690,1425.69 696.84,1432.53 695,1434.37 v1(695,1470)
VDDR: C7.1 C8.1 C9.1 L1.2 U4.45 U4.48 | length 1449
  Top Layer w8: v1(265.81,1050.99) 265.81,1049.58 267.63,1047.76 267.63,1036.83 274.45,1030 C9.1 ; v1(281.57,1117.6) U4.45 ; U4.48 321.18,1058.54 292.64,1030 C9.1 ; L1.2@455,1506.4 455,1539.09 449.09,1545 C7.1 449.09,1569.8 433.89,1585 215,1585 155,1525 155,1504.8 75,1424.8 75,993.15 99.69,968.46 248.46,968.46 275,995 C9.1 ; L1.2@458.94,1478.06 L1.2
  Bottom Layer w8: v1(265.81,1050.99) 266.27,1050.99 267.57,1052.3 267.57,1062.92 281.57,1076.93 v1(281.57,1117.6)
VDDS: C2.1 C3.1 C4.1 C5.1 C10.1 C11.1 C12.1 C13.1 C14.1 FL1.2 R2.2 R4.2 R7.2 R9.2 U2.1 U2.8 U2.13 U3.6 U3.8 U4.13 U4.22 U4.34 U4.44 U6.2 U6.10 U6.11 U7.3 | length 3867.3
  Top Layer w8: U4.44 290.17,1137.28 282.46,1145 269.02,1145 262.19,1151.83 262.19,1156.13 255.41,1162.9 255.41,1286.12 R7.2 159.23,1306.54 147.3,1318.46 147.3,1321.8 128.54,1340.55 128.54,1342.52 135.37,1349.35 141.06,1349.35 157,1365.28 157,1417 185,1445 237.09,1445 FL1.2 336.22,1405 C13.1 390.12,1401.22 C14.1@395.95,1395.39 ; U4.34 400.32,1390.63 C14.1 C14.1@395.95,1395.39 ; U4.13 656.46,1058.54 C10.1 660,1045 v1(650,1035) ; U4.22 C11.1@660.8,1235.71 ; v1(610,1485) 511.1,1485 489.02,1462.92 416.77,1462.92 416.77,1412.51 410.91,1406.65 409.5,1406.65 405.66,1402.81 402.77,1402.81 395.95,1395.98 C14.1@395.95,1395.39 ; v1(635,1312) 665.52,1342.52 678.19,1342.52 C5.1 690.49,1354.82 690.49,1364.49 720,1394 ; v1(656.45,1219.9) 656.45,1231.36 C11.1@660.8,1235.71 ; C11.1@663.24,1236.73 C11.1 C11.1@660.8,1235.71 ; C11.1@669.29,1235.71 C11.1@660.8,1235.71 ; v1(720,1425) 720,1394 ; v1(725,1485) 730,1490 v1(730,1540) ; U6.11@730.04,1549.25 U6.11 U6.10 ; v1(753,1140) 750.7,1142.3 747.18,1142.3 747,1142.47 747,1153.25 745,1155.25 C2.1 745.98,1180 752.81,1186.83 752.81,1194.43 763.38,1205 U2.1 ; U3.6 752.46,1360.88 752.46,1372.49 ; v1@758.29,1142.97 759.09,1142.17 759.09,1118.18 780.7,1096.57 781.93,1096.57 781.93,1086.83 C3.1 ; C3.1 804.53,1095.75 U2.8 ; C4.1 818.15,1345 811,1352.15 809.43,1352.15 806.54,1355.04 U3.8 803.65,1360.88 803.65,1366.17 791.98,1377.83 757.8,1377.83 752.46,1372.49 ; U2.13 903.74,1126.26 v1(905,1125) 1040,1125 1195,1280 1195,1356.37 1175,1376.37 1136.43,1376.37 1110.31,1350.25 1100.41,1350.25 U7.3@1092.6,1342.44 ; U6.2 1013.5,1411.64 1074.89,1350.25 1084.79,1350.25 U7.3@1092.6,1342.44 ; R2.2 1071.46,1235 1103.72,1267.27 1103.72,1268.25 R4.2@1110.55,1275.08 ; R4.2 R4.2@1110.55,1275.08 ; 720,1394 730.96,1394 752.46,1372.49 ; U7.3@1092.6,1342.44 U7.3 1092.6,1294.02 1103.72,1282.89 1103.72,1281.91 R4.2@1110.55,1275.08
  Bottom Layer w8: v1(610,1485) 641.1,1485 667.75,1511.64 667.75,1511.7 689.53,1533.48 720.23,1533.48 726.75,1540 v1(730,1540) ; v1(635,1312) 635,1231.46 656.46,1210 645.37,1198.92 645.37,1065 665.37,1045 ; v1(650,1035) 651.7,1035 660,1043.3 663.68,1043.3 665.37,1045 ; v1(720,1425) 722.3,1427.3 722.3,1434.16 723.83,1435.69 723.83,1484.98 v1(725,1485) ; v1(753,1140) 753,1086.93 758.48,1081.44 758.48,1031.61 ; v1(905,1125) 875.49,1095.49 862.21,1095.49 835,1068.28 835,1060.56 806.06,1031.61 758.48,1031.61 ; 665.37,1045 695.37,1015 743.28,1015 755,1026.72 755,1028.13 758.48,1031.61
XDS_VCC: H2.1 S1.4 | length 1206.6
  Bottom Layer w8: S1.4@545.59,858.39 728.39,858.39 930,1060 930,1350 875,1405 861.87,1405 857.87,1401 847.72,1401 836.72,1390 776.94,1390 767.36,1399.57 695.7,1399.57 645.37,1349.24 574.75,1349.24 569,1343.5 H2.1
pads on no net: H1.0 H2.7 H2.9 S1.0 S1.2 U2.2 U2.3 U2.4 U2.5 U2.6 U2.7 U2.14 U2.15 U2.16 U2.17 U2.19 U2.21 U2.25 U4.7 U4.8 U4.9 U4.10 U4.12 U4.17 U4.18 U4.19 U4.20 U4.21 U4.28 U4.39 U4.40 U4.41 U4.42 U6.4
copper on no net:
  other v3: 75,77.25 75,1525.24 1160,1525.24

## Polygon pours and split planes (outlines as drawn)
GND on Bottom Layer "Bottom Layer-GND" (solid, pour order 2): 0,0 0,1600 1225,1600 1225,1580 1225,1075 935,1075 935,0
GND on Top Layer "Top Layer-GND" (solid, pour order 0): 0,0 0,1600 1225,1600 1225,1580 1225,1075 935,1075 935,0

## Keep-outs
Keep-Out Layer:
  the board outline again, w10

## Silkscreen, mask and mechanical layers (free items; w line width, h text height)
Top Overlay:
  drawing of 20 lines, arcs and shapes, not listed
  text "Headset V1.0" at 172.01,60 h60

## Text inside footprints (layer, text, board x,y; h text height)
A2: Mechanical 20 "2" at 944,341.8 h8 r270; Mechanical 20 "3" at 944,254.8 h8 r270; Mechanical 20 "1" at 944,387.8 h8 r270